# Altium PCB YFF9.PcbDoc
Units mm, origin at the board's own origin, x right, y up, seen from the top; angles counter-clockwise.
Board outline 4.25 x 2.63 mm, 3 copper layers (Layer_1, Layer_26, Layer_2), stack 0.356 mm thick; 1 components, 0 nets, 9 pads, 0 vias.
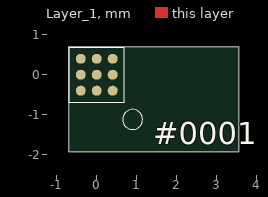
[diagram p0: Layer_1 view]
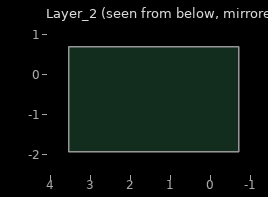
[diagram p1: Layer_2 view, seen from below]
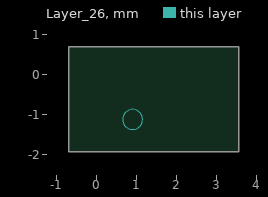
[diagram p2: Layer_26]

## Layer stack, top to bottom
Layer_1: signal copper (thickness not stored)
Layer_26: signal copper 0.0356
Dielectric: dielectric 0.32, FR-4, Dk 4.8
Layer_2: signal copper (thickness not stored)

## Board outline
-0.696,-1.93 3.553,-1.93 3.553,0.696 -0.696,0.696

## Design rules (kind name [scope] priority, off if disabled: settings)
Clearance [All] p1: gap=0.254
PolygonConnect [All] p1: connectstyle=Relief reliefconductorwidth=0.254 reliefentries=4 polygonreliefangle="90 Angle"
RoutingVias [All] p1: holewidth=0.711 width=1.27 viastyle="Through Hole" minholewidth=0.711 minwidth=1.27 maxholewidth=0.711 maxwidth=1.27
SilkscreenOverComponentPads [All] p1: minsilkscreentomaskgap=0.254
SolderMaskExpansion [All] p1: expansion=0.102
Width [All] p1: maxlimit=0.254 minlimit=0.254 preferedwidth=0.254
27 further rules are at their usual default settings.

## Components (designator, comment, footprint, x,y, rotation, side; value= is the part's Value field where it differs from the comment)
#0001 "YFF9" YFF9 0,0 r0 top

## Footprints (in the part's own frame and the unit in brackets; to place one, negate y for a bottom-side part, rotate by r counter-clockwise, add the part's x,y. Pads: shape width x height; smd on the part's side, far side on the other; paste and mask are expansions set on the pad)
YFF9 [mm]
  round 0.249 smd: A1(0.399,-0.399) A2(0,-0.399) A3(-0.399,-0.399) B1(0.399,0) B2(0,0) B3(-0.399,0) C1(0.399,0.399) C2(0,0.399) C3(-0.399,0.399)
  Layer_26 lines w0.01: 0.648,-1.119 cw(c0.898,-1.119) 1.148,-1.119 cw(c0.898,-1.119) 0.648,-1.119
  silkscreen extent -0.69,-1.37 1.15,0.69

## Nets (pads, with @x,y where several pads share a name; then routed paths per layer and width w, separated by ;. In a path a pad name is that pad's centre, name@x,y a point inside that pad or via, vN(x,y) a via of type N, cw(c..) or ccw(c..) an arc to the next point about the centre after c; other vN are vias at no path point)
pads on no net: #0001.A1 #0001.A2 #0001.A3 #0001.B1 #0001.B2 #0001.B3 #0001.C1 #0001.C2 #0001.C3